# Altium PCB PCB1.PcbDoc (part 2 of 2)
Units mm, origin at the board's own origin, x right, y up, seen from the top; angles counter-clockwise.
Board outline 22.86 x 46 mm, 4 copper layers (Top Layer (sig), Plane (gnd), Plane2 (gnd), Bottom Layer (sig)), stack 1.566 mm thick; 61 components, 57 nets, 283 pads, 148 vias.
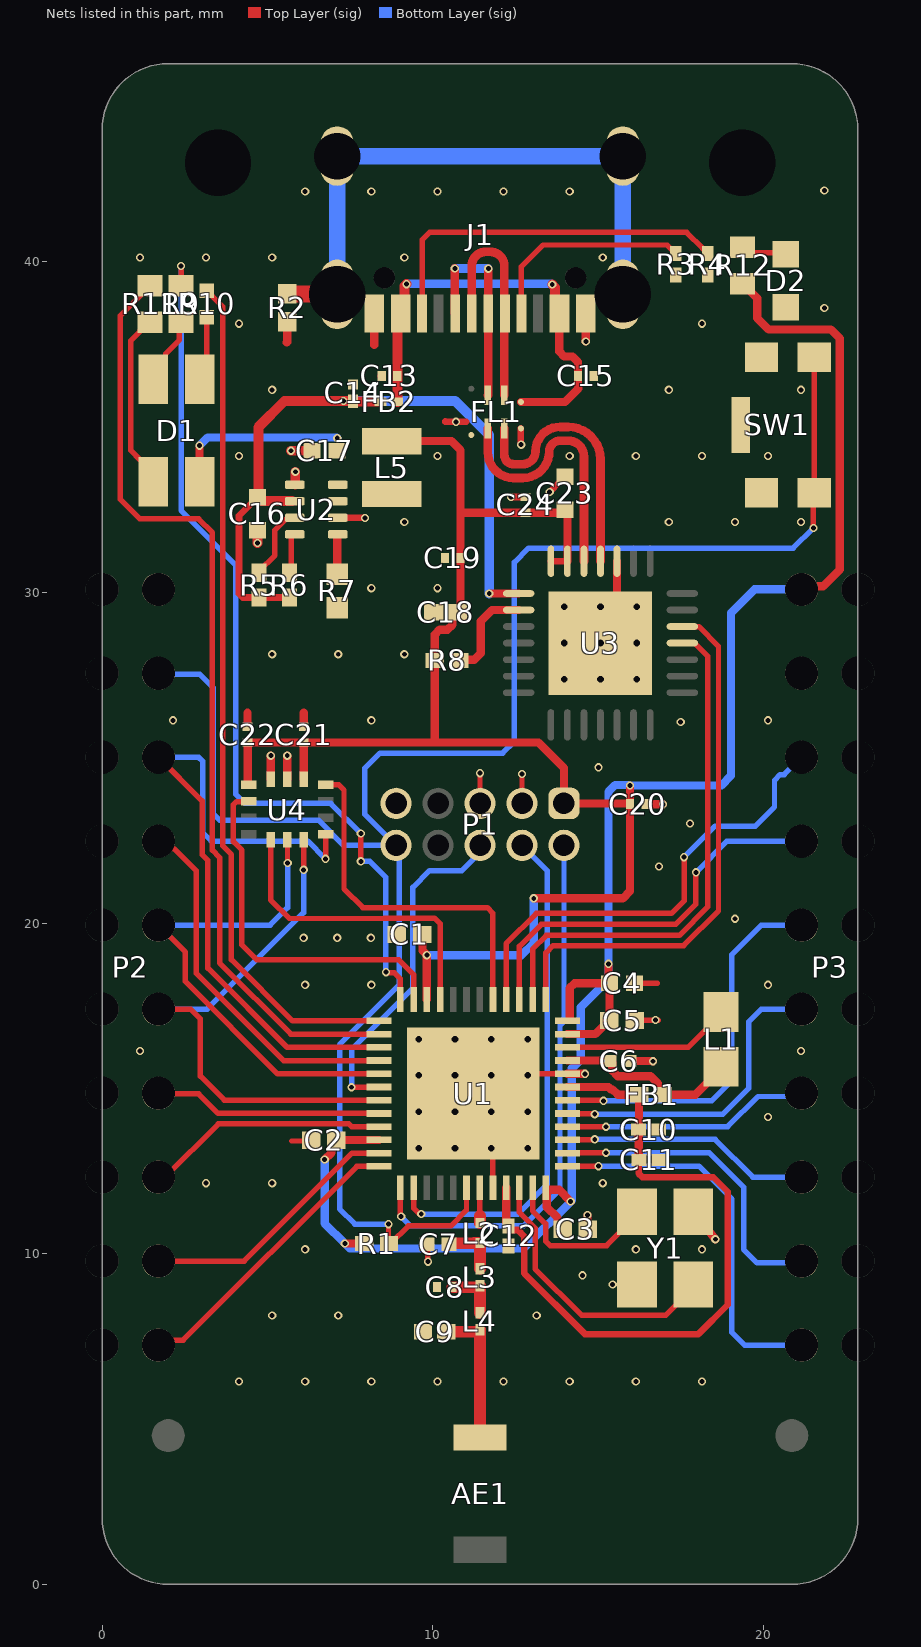
[diagram p4: the nets of this part, all layers, seen from the top]

## Part data (continued)
U3: library part CMP-2000-04924-1, "Single-Chip USB to URAT Bridge, 3.3 V, -40 to 85 degC, 28-Pin QFN, RoHS, Tape and Reel", Manufacturer="Silicon Labs", Operating Supply Voltage (Max)=3.6V, Operating Supply Voltage (Min)=3V, Operating Supply Voltage (Typ)=3.3V, Operating Temperature (Max)=85C, Operating Temperature (Min)=-40C, Operating Temperature Classification=Industrial, Package Description="28-Pin Quad-Flat No-Leads Package, Body 5 x 5 mm, Pitch 0.5 mm", Package Reference=QFN-28, Package Type=QFNEP, Supply Current=26mA, Data Rate=1000kbps, Datasheet URL=http://www.mouser.com/ds/2/368/CP2102-9-247052.pdf, Datasheet Version="Rev. 1.6, 12/2013", Interface Circuit Standard 1=RS-232, Manufacturer URL=http://www.silabs.com/, Mounting=SurfaceMount, Number of Channels=1, Package URL=http://www.silabs.com/Support%20Documents/TechnicalDocs/C8051T61x.pdf, Packaging=TapeandReel, Pin Count=28, Rad Hardened=No, Transmitter and Receiver FIFO Counter=No
U4: "BMI323 / IMU combining accelerometer and gyroscope /  / Accelerometer (A): 16-bit / ±2 g: 16384 LSB/g / ±4 g: 8192 LSB/g / ±8 g: 4096 LSB/g / ±16 g: 2048 LSB/g /  / Gyroscope (G): 16-bit / ±125 °/s: 262.1 LSB/°/s / ±250 °/s: 131.1 LSB/°/s / ±500 °/s: 65.5 LSB/°/s / ±1000 °/s: 32.8 LSB/°/s / ±2000 °/s: 16.4 LSB/°/s /  / Output data rate (ODR) / (A): 12.5 Hz … 6.4 kHz / (G): 25 Hz … 6.4 kHz"
Y1: library part CMP-27762-014975-1, "Crystal 32MHz ±30ppm (Tol) ±30ppm (Stability) 10pF FUND 50Ω 4-Pin SMD T/R", Case/Package=CSMD, ESR (Equivalent Series Resistance)=50R, Frequency Stability=30ppm, Load Capacitance=10pF, Max Operating Temperature=70°C, Min Operating Temperature=-20°C, Package Quantity=1000, Depth=2.5mm, Frequency=32MHz, Frequency Tolerance=30ppm, Height=1mm, Lead Free="Lead Free", Length=3.2mm, Mount="Surface Mount", Number of Pins=4, Packaging="Tape and Reel", Series=ABM8G, Series Resistance=50R, Termination=SMD/SMT, Tolerance=30ppm, Width=2.5mm

## Via types
v1: diameter 0.25, hole 0.15, Top Layer (sig) to Bottom Layer (sig), tented both sides, 123 vias
v2: diameter 0.5, hole 0.2, Top Layer (sig) to Bottom Layer (sig), tented both sides, 25 vias

## Nets (pads, with @x,y where several pads share a name; then routed paths per layer and width w, separated by ;. In a path a pad name is that pad's centre, name@x,y a point inside that pad or via, vN(x,y) a via of type N, cw(c..) or ccw(c..) an arc to the next point about the centre after c; other vN are vias at no path point)
3V3: C1.2 C2.2 C3.2 C4.1 C5.2 C17.1 C18.1 C19.1 C20.1 C21.1 C22.1 C23.1 C24.1 D1.1 L5.2 P1.1 P3.1 R1.2 R8.1 R12.1 U1.10 U1.22 U1.36 U1.47 U1.48 U2.8 U3.6 U3.7 U4.5 U4.8 | length 107.4
  Top Layer (sig) w0.165: C17.1@7.11,34.29 C17.1@7.127,34.273
  Top Layer (sig) w0.2: U3.7@13.574,30.948 U3.6@14.049,30.948
  Top Layer (sig) w0.25: D1.1@2.946,33.477 v1(2.946,34.442) ; U4.8@4.437,24.188 4.402,24.188 C22.1@4.402,25.467 C21.1@6.099,25.467 ; U4.5@6.099,24.351 6.099,24.463 C21.1@6.099,25.467 ; v1(6.731,12.852) 6.932,13.053 6.932,13.302 7.071,13.441 8.368,13.441 U1.22@8.372,13.445 ; v1(7.341,10.312) 7.928,10.312 R1.2@7.93,10.311 ; L5.2@8.763,34.582 10.568,34.582 10.842,34.308 C18.1@10.842,29.492 ; C1.2@9.687,19.66 9.687,19.168 v1(9.822,19.033) U1.10@9.822,17.695 ; C18.1@10.756,29.406 10.72,29.406 10.593,29.279 10.593,29.025 10.447,28.879 10.209,28.879 10.063,28.733 R8.1@10.063,27.95 10.063,25.472 10.058,25.467 ; 10.989,32.413 C24.1@12.775,32.413 ; C24.1@12.8,32.413 13.912,32.413 C23.1@14,32.5 14.074,32.426 U3.6@14.074,30.948 ; v1(13.056,20.752) 15.748,20.752 15.964,20.968 C20.1@15.964,23.602 C20.1@15.964,23.622 ; U1.36@13.447,11.97 U1.36@13.447,11.938 ; C3.2@13.816,10.853 C3.2@13.928,10.741 13.908,10.741 13.773,10.876 13.773,11.094 13.447,11.42 U1.36@13.447,11.938 ; U1.47@14.072,16.645 14.918,16.645 15.326,17.053 C5.2@15.346,17.053 15.345,17.054 C4.1@15.344,18.182 ; U1.48@14.143,17.07 14.143,18.035 14.29,18.182 C4.1@15.344,18.182 ; v1(14.173,11.582) 13.818,11.938 U1.36@13.447,11.938 ; v1(15.316,18.771) 15.316,18.209 C4.1@15.344,18.182 ; v1(15.964,24.168) C20.1@15.964,23.622 ; R12.1@19.369,39.348 19.419,39.348 19.619,39.148 19.619,39.098 19.812,38.906 19.812,38.304 20.16,37.956 22.042,37.956 22.314,37.684 22.314,30.696 21.807,30.189 21.25,30.189 P3.1@21.16,30.099 ; C21.1@6.099,25.467 10.058,25.467 ; 10.058,25.467 13.199,25.467 13.97,24.696 P1.1@13.97,23.622 C20.1@15.964,23.622 ; C4.1@15.344,18.182 C4.1@15.344,18.182
  Bottom Layer (sig) w0.25: v1(2.946,34.442) 3.194,34.69 7.093,34.69 v1(7.112,34.671) ; v1(6.731,12.852) 6.731,10.922 v1(7.341,10.312) 7.493,10.16 12.751,10.16 14.206,11.615 14.206,15.61 14.478,15.882 14.478,17.459 15.316,18.297 v1(15.316,18.771) 15.316,23.978 15.519,24.181 15.951,24.181 v1(15.964,24.168) 18.732,24.168 19.025,24.46 19.025,29.388 19.736,30.099 P3.1@21.16,30.099 ; v1(9.822,19.033) 12.683,19.033 13.056,19.406 v1(13.056,20.752)
CC1: J1.A5 R3.2 | length 6.5
  Top Layer (sig) w0.165: J1.A5@12.68,38.447 12.68,39.858 13.335,40.513 17.089,40.513 17.206,40.396 17.256,40.396 17.348,40.304 R3.2@17.348,40.254
CC2: J1.B5 R4.2 | length 11.2
  Top Layer (sig) w0.165: J1.B5@9.68,38.447 9.68,40.668 9.906,40.894 17.68,40.894 18.173,40.401 18.223,40.401 18.315,40.309 R4.2@18.315,40.259
CSB: U1.9 U4.12 | length 9.5
  Top Layer (sig) w0.165: U4.12@5.099,22.525 5.099,20.707 5.664,20.142 8.53,20.142 8.54,20.152 10.053,20.152 10.222,19.983 U1.9@10.222,17.695
GND: C1.1 C2.1 C3.1 C4.2 C5.1 C6.2 C7.1 C8.2 C9.2 C10.2 C11.2 C12.2 C13.2 C14.2 C15.2 C16.2 C17.2 C18.2 C19.2 C20.2 C21.2 C22.2 C23.2 C24.2 D2.1 FL1.5 FL1.8 J1.A1-B12 J1.B1-A12 P1.3 P1.5 P1.9 P2.10 P3.2 R2.1 R3.1 R4.1 R7.1 SW1.A1 SW1.A2 SW1.G1 U1.32 U1.44 U1.49 U2.1 U2.6 U3.3 U3.29 U4.6 U4.7 Y1.2 Y1.4 | length 20.9
  Top Layer (sig) w0.165: 5.74,13.411 6.301,13.411 C2.1@6.327,13.437 ; C9.2@9.713,7.706 C9.2@9.723,7.716 ; v1@9.83,9.804 v1(9.855,9.76) 9.855,10.16 C7.1@9.83,10.287 ; P1.5@11.43,23.622 v1(11.43,24.536) ; v2(11.772,13.195) 11.822,13.145 U1.32@11.822,11.995 ; P1.3@12.7,23.622 v1(12.7,24.511) ; v2(12.872,15.395) 12.922,15.445 U1.44@14.072,15.445 ; C4.2@16.101,18.182 16.785,18.182 16.789,18.186 ; C5.1@16.106,17.053 16.122,17.069 v1@16.815,17.069 ; C10.2@16.831,13.758 C10.2@16.836,13.762 ; C11.2@16.841,12.841 C11.2@16.847,12.847 ; SW1.G1@19.314,35.07 SW1.G1@19.326,35.082 ; SW1.A1@19.889,33.02 SW1.A1@19.939,33.02 SW1.A1@19.989,33.02 ; SW1.A2@19.889,37.12 SW1.A2@19.989,37.12
  Top Layer (sig) w0.2: U2.6@7.277,32.258 v1(7.95,32.258) ; 10.375,35.175 10.384,35.166 v1(10.706,35.166) 11.012,35.166 ; v1(12.37,32.893) 12.373,32.89 12.797,32.89 C24.2@12.8,32.888 ; v1@12.667,34.483 FL1.8@12.667,34.966 ; v1(13.538,33.045) 13.843,33.35 C23.2@13.85,33.35
  Top Layer (sig) w0.25: 4.394,26.365 4.394,25.942 C22.2@4.402,25.942 ; U4.7@5.099,24.351 5.099,25.063 v1(5.103,25.067) ; 5.588,37.567 5.598,37.577 R2.1@5.598,38.191 ; U4.6@5.599,24.351 v1(5.599,25.067) ; 6.096,26.365 6.096,25.942 C21.2@6.099,25.942 ; C14.2@7.594,36.293 C14.2@7.595,36.294 ; 8.23,37.491 J1.B1-A12@8.23,38.447 ; C13.2@8.454,36.551 C13.2@8.454,36.553 ; C18.2@10.012,29.388 C18.2@10.03,29.406 ; C19.2@10.367,31.039 C19.2@10.367,31.051 ; U1.44@14.072,15.445 v1(14.606,15.445) ; v1(14.63,37.592) J1.A1-B12@14.63,38.447 ; C3.1@14.681,10.719 v1(14.681,11.176) ; v2(15.074,29.573) 15.234,29.573 15.574,29.913 U3.3@15.574,30.948 ; C6.2@15.936,15.828 16.659,15.828 v1(16.662,15.824) ; C20.2@16.439,23.602 16.439,23.597 v1(16.967,23.597) ; Y1.2@17.907,11.278 18.355,10.693 v1(18.548,10.439)
  Top Layer (sig) w0.3: v1(4.699,31.496) C16.2@4.699,31.877 ; v1(5.715,34.29) C17.2@6.35,34.29 ; U2.1@5.842,33.274 v1(5.842,33.655)
  other v1: 4.142,6.134 6.142,6.134 8.142,6.134 10.142,6.134 12.142,6.134 14.142,6.134 16.142,6.134 18.142,6.134 5.142,8.134 7.142,8.134 13.142,8.134 15.443,9.068 14.529,9.347 6.142,10.134 16.142,10.134 18.142,10.134 3.142,12.134 5.142,12.134 15.142,12.134 20.142,14.134 1.142,16.134 21.142,16.134 16.739,17.069 6.142,18.134 8.142,18.134 20.142,18.134 6.096,19.558 7.112,19.558 8.128,19.558 19.142,20.134 16.84,21.717 17.78,23.012 15.011,24.714 17.501,26.086 2.142,26.134 8.142,26.134 20.142,26.134 5.142,28.134 7.142,28.134 9.142,28.134 8.142,30.134 10.142,30.134 9.142,32.134 17.142,32.134 19.142,32.134 21.142,32.134 4.142,34.134 10.142,34.134 14.142,34.134 16.142,34.134 18.142,34.134 20.142,34.134 12.675,34.475 5.142,36.134 17.142,36.134 21.142,36.134 4.142,38.134 18.142,38.134 21.844,38.608 1.142,40.134 3.142,40.134 5.142,40.134 9.142,40.134 15.142,40.134 6.142,42.134 8.142,42.134 10.142,42.134 12.142,42.134 14.142,42.134 21.844,42.164
  other v2: 9.572,13.195 10.672,13.195 12.872,13.195 9.572,14.295 10.672,14.295 11.772,14.295 12.872,14.295 9.572,15.395 10.672,15.395 11.772,15.395 9.572,16.495 10.672,16.495 11.772,16.495 12.872,16.495 13.974,27.373 15.074,27.373 16.174,27.373 13.974,28.473 15.074,28.473 16.174,28.473 13.974,29.573 16.174,29.573
INT1: U1.5 U4.4 | length 11
  Top Layer (sig) w0.165: U4.4@6.761,24.188 7.155,24.188 7.315,24.028 7.315,21.036 7.884,20.467 11.655,20.467 11.822,20.3 U1.5@11.822,17.695
INT2: U1.11 U4.9 | length 11.2
  Top Layer (sig) w0.165: U4.9@4.437,23.688 4.428,23.679 4.064,23.679 3.967,23.583 3.967,22.467 4.227,22.207 4.227,19.345 4.674,18.898 8.966,18.898 9.422,18.442 U1.11@9.422,17.695
NetAE1_1: AE1.1 C9.1 L4.2 | length 4.3
  Top Layer (sig) w0.355: C9.1@10.413,7.645 11.369,7.645 L4.2@11.428,7.704 11.428,4.446 AE1.1@11.43,4.443
NetC6_1: C6.1 FB1.1 L1.2 U1.45 | length 5.7
  Top Layer (sig) w0.25: U1.45@14.072,15.845 C6.1@15.311,15.845 ; C6.1@15.357,15.845 15.43,15.772 15.43,15.537 15.595,15.372 16.588,15.372 16.808,15.152 16.808,14.918 16.914,14.811 17.946,14.811 18.72,15.585 L1.2@18.72,15.659
NetC7_2: C7.2 L2.2 L3.1 | length 1.7
  Top Layer (sig) w0.355: C7.2@10.49,10.287 10.522,10.319 11.253,10.319 11.259,10.325 L2.2@11.428,10.325 L3.1@11.428,9.544
NetC8_1: C8.1 L3.2 L4.1 | length 1.7
  Top Layer (sig) w0.355: C8.1@10.601,8.992 11.384,8.992 L3.2@11.428,9.036 L4.1@11.428,8.212
NetC10_1: C10.1 C11.1 C12.1 FB1.2 U1.33 U1.43 | length 21.2
  Top Layer (sig) w0.2: C12.1@12.294,10.845 12.294,10.8 12.375,10.718 12.574,10.718 12.768,10.525 12.768,9.406 14.605,7.569 18.035,7.569 18.923,8.457 18.923,11.878 18.485,12.316 16.345,12.316 16.227,12.433 C11.1@16.227,12.846
  Top Layer (sig) w0.25: U1.33@12.222,11.995 12.222,10.963 12.294,10.891 C12.1@12.294,10.845 ; U1.43@14.072,15.045 15.313,15.045 15.386,14.972 15.439,14.972 15.599,14.812 FB1.2@16.251,14.811 ; C11.1@16.227,12.846 16.227,13.753 C10.1@16.223,13.758 16.237,13.772 16.237,14.797 FB1.2@16.251,14.811
NetD1_2: D1.2 R11.1 | length 5.2
  Top Layer (sig) w0.165: R11.1@1.27,38.024 1.245,38.024 1.158,37.937 1.158,37.911 0.867,37.621 0.867,34.299 1.149,34.018 1.182,34.018 1.549,33.65 D1.2@1.549,33.35
NetD1_3: D1.3 R10.1 | length 2.1
  Top Layer (sig) w0.165: D1.3@2.949,36.45 3.166,36.667 R10.1@3.166,38.429
NetD1_4: D1.4 R9.1 | length 2.1
  Top Layer (sig) w0.165: D1.4@1.549,36.45 1.917,36.818 1.917,37.223 2.337,37.643 2.337,38.134 R9.1@2.382,38.179
NetD2_2: D2.2 R12.2 | length 1.3
  Top Layer (sig) w0.165: R12.2@19.369,40.273 20.632,40.273 D2.2@20.673,40.231
NetJ1_1: J1.1 J1.2 J1.3 J1.4 R2.2 | length 18.5
  Top Layer (sig) w0.5: R2.2@5.598,39.041 5.607,39.031 7.101,39.031 J1.2@7.11,39.022
  Bottom Layer (sig) w0.5: J1.2@7.11,39.022 J1.4@7.11,43.202 J1.3@15.75,43.202 J1.1@15.75,39.022
NetL1_1: L1.1 U1.46 | length 5.1
  Top Layer (sig) w0.165: U1.46@14.072,16.245 17.728,16.245 18.72,17.237 L1.1@18.72,17.311
NetL2_1: L2.1 U1.31 | length 1.3
  Top Layer (sig) w0.165: U1.31@11.422,11.995 11.425,11.992 11.425,10.928 L2.1@11.428,10.925
  Top Layer (sig) w0.355: L2.1@11.428,10.925 11.428,11.146
NetL5_1: L5.1 U2.7
NetR5_2: R5.2 U2.3 | length 2.1
  Top Layer (sig) w0.165: R5.2@4.75,30.601 4.75,30.651 5.226,31.127 5.226,31.886 5.56,32.22 5.677,32.22 U2.3@5.715,32.258
NetR6_2: R6.2 U2.4 | length 1.3
  Top Layer (sig) w0.165: R6.2@5.664,30.601 5.713,30.65 5.713,31.72 5.756,31.762 U2.4@5.827,31.762
NetR7_2: R7.2 U2.5 | length 1.2
  Top Layer (sig) w0.25: R7.2@7.112,30.548 7.112,31.725 U2.5@7.137,31.75
NetR8_2: R8.2 U3.9 | length 3
  Top Layer (sig) w0.25: R8.2@10.813,27.95 10.828,27.965 11.252,27.965 11.455,28.169 11.455,29.134 11.795,29.473 U3.9@12.599,29.473
NetU1_34: U1.34 Y1.1 | length 8.5
  Top Layer (sig) w0.165: U1.34@12.622,11.995 12.622,11.255 13.1,10.776 13.1,9.544 14.509,8.135 17.047,8.135 17.88,8.968 Y1.1@17.88,9.068
NetU1_35: U1.35 Y1.3 | length 5.1
  Top Layer (sig) w0.165: U1.35@13.022,11.995 13.022,11.3 13.415,10.906 13.415,10.384 13.552,10.248 15.26,10.248 16.18,11.168 Y1.3@16.18,11.268
nRST: P1.10 P2.9 R1.1 SW1.B1 SW1.B2 U1.30 | length 56.7
  Top Layer (sig) w0.165: v1(8.661,10.897) 8.661,10.329 R1.1@8.68,10.311 8.73,10.311 9.263,10.844 10.546,10.844 11.022,11.32 U1.30@11.022,11.995 ; v1(21.514,31.953) 21.514,32.995 SW1.B1@21.539,33.02 SW1.B2@21.539,37.12
  Bottom Layer (sig) w0.165: P2.9@1.7,27.559 1.735,27.524 2.956,27.524 3.363,27.117 3.363,23.307 3.556,23.114 6.539,23.114 7.301,22.352 P1.10@8.89,22.352 ; v1(8.661,10.897) 7.645,10.897 7.186,11.356 7.186,16.33 8.981,18.125 8.981,22.261 P1.10@8.89,22.352 ; v1(21.514,31.953) 20.904,31.344 12.903,31.344 12.471,30.912 12.471,25.502 12.116,25.146 8.407,25.146 7.95,24.689 7.95,23.292 P1.10@8.89,22.352
P0.00: P2.2 U1.23 | length 8
  Top Layer (sig) w0.165: P2.2@1.7,9.779 4.298,9.779 7.564,13.045 U1.23@8.372,13.045
P0.01: P2.1 U1.24 | length 8.9
  Top Layer (sig) w0.165: P2.1@1.7,7.239 1.848,7.387 2.448,7.387 7.705,12.645 U1.24@8.372,12.645
P1.02: P3.4 U1.3 | length 12
  Top Layer (sig) w0.165: U1.3@12.622,17.695 12.622,19.302 13.284,19.964 17.346,19.964 17.956,20.574 17.956,21.535 v1(17.96,21.539)
  Bottom Layer (sig) w0.165: v1(17.96,21.539) 18.9,22.479 P3.4@21.16,22.479
P1.03: P3.3 U1.4 | length 14.2
  Top Layer (sig) w0.165: U1.4@12.222,17.695 12.222,19.384 13.132,20.295 17.221,20.295 17.602,20.676 v1(17.602,21.996)
  Bottom Layer (sig) w0.165: v1(17.602,21.996) 18.542,22.936 19.756,22.936 20.337,23.517 20.337,24.318 20.509,24.49 20.631,24.49 P3.3@21.16,25.019
P1.09: P3.10 U1.37 | length 11.7
  Top Layer (sig) w0.165: U1.37@14.072,12.645 15.007,12.645 v1(15.011,12.649)
  Bottom Layer (sig) w0.165: v1(15.011,12.649) 18.052,12.649 19.05,11.651 19.05,7.62 19.431,7.239 P3.10@21.16,7.239
P1.10: P3.9 U1.38 | length 9.6
  Top Layer (sig) w0.165: U1.38@14.072,13.045 14.077,13.05 15.235,13.05 v1(15.24,13.056)
  Bottom Layer (sig) w0.165: v1(15.24,13.056) 18.364,13.056 19.406,12.014 19.406,10.135 19.812,9.728 21.109,9.728 P3.9@21.16,9.779
P1.11: P3.8 U1.39 | length 7.6
  Top Layer (sig) w0.165: U1.39@14.072,13.445 14.08,13.453 14.891,13.453 v1(14.9,13.462)
  Bottom Layer (sig) w0.165: v1(14.9,13.462) 18.542,13.462 19.685,12.319 P3.8@21.16,12.319
P1.12: P3.7 U1.40 | length 7.5
  Top Layer (sig) w0.165: U1.40@14.072,13.845 14.073,13.844 v1(15.24,13.843) v1(15.24,13.843)
  Bottom Layer (sig) w0.165: v1(15.24,13.843) 18.923,13.843 19.838,14.758 21.059,14.758 P3.7@21.16,14.859
P1.13: P3.6 U1.41 | length 9.6
  Top Layer (sig) w0.165: U1.41@14.072,14.245 14.082,14.234 14.89,14.234 v1(14.9,14.224)
  Bottom Layer (sig) w0.165: v1(14.9,14.224) 18.778,14.224 19.558,15.004 19.558,17.018 19.939,17.399 P3.6@21.16,17.399
P1.14: P3.5 U1.42 | length 11.5
  Top Layer (sig) w0.165: U1.42@14.072,14.645 14.079,14.638 15.155,14.638 v1(15.164,14.628)
  Bottom Layer (sig) w0.165: v1(15.164,14.628) 18.438,14.628 19.05,15.24 19.05,19.05 19.939,19.939 P3.5@21.16,19.939
P2.01: R9.2 U1.12 | length 27.3
  Top Layer (sig) w0.165: R9.2@2.388,39.294 v1(2.388,39.878) ; v1(7.823,21.869) v1(7.823,22.71) ; v1(8.585,18.517) 8.601,18.5 8.836,18.5 9.019,18.317 9.019,17.697 U1.12@9.022,17.695
  Bottom Layer (sig) w0.165: v1(2.388,39.878) 2.388,32.487 4.039,30.836 4.039,23.901 ; 4.064,23.876 4.318,23.622 6.911,23.622 v1(7.823,22.71) ; v1(7.823,21.869) 8.103,21.869 8.585,21.387 v1(8.585,18.517)
P2.02: R10.2 U1.13 | length 25.8
  Top Layer (sig) w0.165: R10.2@3.166,39.129 3.309,38.987 3.652,38.643 3.652,22.337 3.912,22.077 3.912,18.898 5.765,17.044 U1.13@8.371,17.044
P2.03: R11.2 U1.14 | length 28.9
  Top Layer (sig) w0.165: R11.2@1.45,39.279 0.552,38.381 0.552,32.819 1.138,32.233 2.921,32.233 3.337,31.817 3.337,22.206 3.556,21.987 3.556,18.796 5.707,16.645 U1.14@8.372,16.645
P2.04: P2.8 U1.15 U4.1 | length 21.5
  Top Layer (sig) w0.165: P2.8@1.7,25.019 3.022,23.697 3.022,22.076 3.2,21.897 3.2,18.644 5.599,16.245 U1.15@8.372,16.245 ; v1(6.756,21.946) 6.759,21.948 6.759,22.686 U4.1@6.761,22.688
  Bottom Layer (sig) w0.165: P2.8@1.7,25.019 2.921,25.019 3.048,24.892 3.048,22.733 3.302,22.479 6.223,22.479 v1(6.756,21.946)
P2.05: P2.7 U1.16 | length 11.2
  Top Layer (sig) w0.165: P2.7@1.7,22.479 1.926,22.479 2.162,22.243 2.191,22.243 2.845,21.59 2.845,18.491 5.491,15.845 U1.16@8.372,15.845
P2.06: P2.6 U1.17 U4.13 | length 15.2
  Top Layer (sig) w0.165: P2.6@1.7,19.939 2.515,19.124 2.515,18.237 5.307,15.445 U1.17@8.372,15.445 ; U4.13@5.599,22.525 5.606,22.518 5.606,21.826 v1(5.613,21.819)
  Bottom Layer (sig) w0.165: P2.6@1.7,19.939 5.08,19.939 5.613,20.472 v1(5.613,21.819)
P2.08: P2.5 U1.19 U4.14 | length 16.6
  Top Layer (sig) w0.165: P2.5@1.7,17.399 2.679,17.399 2.972,17.106 2.972,15.372 3.699,14.645 U1.19@8.372,14.645 ; v1(6.096,21.615) 6.098,21.617 U4.14@6.099,22.525 U4.14@6.099,22.525
  Bottom Layer (sig) w0.165: P2.5@1.7,17.399 3.175,17.399 6.096,20.32 v1(6.096,21.615)
P2.09: P2.4 U1.20 | length 6.9
  Top Layer (sig) w0.165: P2.4@1.7,14.859 1.725,14.834 2.92,14.834 3.51,14.245 U1.20@8.372,14.245
P2.10: P2.3 U1.21 | length 7.4
  Top Layer (sig) w0.165: P2.3@1.7,12.319 1.905,12.319 3.515,13.929 7.463,13.929 7.547,13.845 U1.21@8.372,13.845
SWCLK: P1.4 U1.26 | length 15.7
  Top Layer (sig) w0.165: U1.26@9.423,11.994 9.423,11.38 9.585,11.218 9.636,11.218 v1(9.652,11.201)
  Bottom Layer (sig) w0.165: v1(9.652,11.201) 12.573,11.201 13.462,12.09 13.462,21.59 P1.4@12.7,22.352
SWDIO: P1.2 U1.25 | length 16.7
  Top Layer (sig) w0.165: U1.25@9.022,11.995 9.019,11.992 9.019,11.173 9.043,11.149 v1(9.043,11.126)
  Bottom Layer (sig) w0.165: v1(9.043,11.126) 9.326,10.844 12.749,10.844 13.849,11.944 13.849,16.906 13.97,17.027 P1.2@13.97,22.352
SWO: P1.6 U1.18 | length 10.3
  Top Layer (sig) w0.165: v1(7.544,15.037) 7.548,15.041 8.368,15.041 U1.18@8.372,15.045
  Bottom Layer (sig) w0.165: v1(7.544,15.037) 7.544,16.18 9.398,18.034 9.398,21.082 9.906,21.59 10.88,21.59 11.43,22.14 P1.6@11.43,22.352
UART_RX: U1.2 U3.25 | length 15.9
  Top Layer (sig) w0.165: U1.2@13.022,17.695 13.022,19.219 13.437,19.634 17.461,19.634 18.317,20.49 18.317,28.08 17.935,28.462 17.56,28.462 U3.25@17.549,28.473
UART_TX: U1.1 U3.26 | length 16.5
  Top Layer (sig) w0.165: U1.1@13.422,17.695 13.422,19.101 13.64,19.319 17.592,19.319 18.644,20.371 18.644,28.372 18.049,28.966 17.555,28.966 U3.26@17.549,28.973
USB_D_N: FL1.2 J1.A7 J1.B7 | length 6.8
  Top Layer (sig) w0.265: J1.A7@11.18,38.447 11.18,39.882 cw(c11.608,39.882) 11.608,40.31 11.735,40.31 cw(c11.735,39.878) 12.167,39.878 FL1.2@12.167,35.966
USB_D_P: FL1.3 J1.A6 J1.B6 | length 6.2
  Top Layer (sig) w0.265: J1.B6@10.668,38.459 v1(10.668,39.802) ; FL1.3@11.667,35.966 11.68,35.966 J1.A6@11.68,38.447 v1(11.68,39.798)
  Bottom Layer (sig) w0.265: v1(10.668,39.802) 11.68,39.802 v1(11.68,39.798)
USBD_N: FL1.6 U3.5 | length 8.2
  Top Layer (sig) w0.265: FL1.6@11.667,34.966 11.667,34.246 ccw(c12.446,34.246) 12.446,33.467 12.725,33.467 ccw(c12.725,34.265) 13.523,34.265 cw(c13.854,34.265) 13.854,34.595 14.097,34.595 cw(c14.097,34.118) 14.574,34.118 U3.5@14.574,30.948
USBD_P: FL1.7 U3.4 | length 8.2
  Top Layer (sig) w0.265: FL1.7@12.167,34.966 12.167,34.163 ccw(c12.446,34.163) 12.446,33.884 12.725,33.884 ccw(c12.725,34.265) 13.106,34.265 cw(c13.854,34.265) 13.854,35.012 14.097,35.012 cw(c14.097,34.035) 15.074,34.035 U3.4@15.074,30.948
V_USB: C14.1 C16.1 FB2.2 R5.1 R6.1 U2.2 U3.8 | length 22.4
  Top Layer (sig) w0.2: C16.1@4.648,32.791 4.605,32.791 4.14,32.326 4.14,29.968 4.257,29.851 R5.1@4.75,29.851 ; R5.1@4.772,29.873 4.795,29.851 R6.1@5.664,29.851 ; U2.2@5.745,32.766 5.823,32.766 U2.2@5.827,32.762 ; FB2.2@8.408,35.78 FB2.2@8.42,35.769
  Top Layer (sig) w0.25: v1(11.709,29.972) U3.8@12.599,29.973 U3.8@12.599,29.973
  Top Layer (sig) w0.3: C16.1@4.699,32.885 4.818,32.766 U2.2@5.745,32.766 ; C16.1@4.724,32.944 4.724,35.001 5.515,35.791 v1(7.299,35.791) C14.1@7.594,35.791 ; C14.1@7.637,35.78 FB2.2@8.408,35.78
  Bottom Layer (sig) w0.3: v1(7.299,35.791) 10.682,35.791 11.709,34.764 v1(11.709,29.972)
VBUS: C13.1 C15.1 FB2.1 FL1.1 J1.A4-B9 J1.B4-A9 | length 13.6
  Top Layer (sig) w0.25: J1.B4-A9@8.929,38.346 J1.B4-A9@9.03,38.447 ; FL1.1@12.667,35.766 13.999,35.766 14.402,36.17 14.394,36.177 C15.1@14.394,36.553 14.394,36.974 14.224,37.144 13.976,37.144 13.83,37.291 J1.A4-B9@13.83,38.447
  Top Layer (sig) w0.3: FB2.1@8.928,35.769 C13.1@8.929,36.553 ; C13.1@8.929,36.553 J1.B4-A9@8.929,38.346 ; J1.B4-A9@9.03,38.447 9.145,38.562 9.145,39.27 v1(9.205,39.329) ; v1(13.614,39.319) 13.703,39.231 13.703,38.574 J1.A4-B9@13.83,38.447
  Bottom Layer (sig) w0.25: v1(9.205,39.329) 9.22,39.345 13.589,39.345 v1(13.614,39.319)
pads on no net: AE1.2 FD1.1 FD2.1 FL1.4 J1. J1.A8 J1.B8 MH1.3 MH2.3 P1.7 P1.8 P2. P3. U1.6 U1.7 U1.8 U1.27 U1.28 U1.29 U3.1 U3.2 U3.10 U3.11 U3.12 U3.13 U3.14 U3.15 U3.16 U3.17 U3.18 U3.19 U3.20 U3.21 U3.22 U3.23 U3.24 U3.27 U3.28 U4.2 U4.3 U4.10 U4.11

## Polygon pours and split planes (outlines as drawn)
GND on Top Layer (sig) "GND_L01_P009" (solid, remove dead copper, pour order 9): 0.508,5.588 22.352,5.588 22.352,44.704 0.508,44.704
NetL5_1 on Top Layer (sig) "NETL5_1_L01_P006" (solid, pour order 6): 6.807,32.639 6.807,32.893 6.833,32.918 7.518,32.918 7.671,33.041 7.671,33.35 7.747,33.426 9.652,33.426 9.703,33.376 9.703,32.588 9.652,32.537 7.569,32.537 7.442,32.614 6.833,32.614
V_USB on Top Layer (sig) "V_USB_L01_P008" (solid, pour order 8): 6.147,32.664 6.147,32.868 6.096,32.918 5.359,32.918 5.131,33.147 4.445,33.147 4.394,33.096 4.394,32.664 4.445,32.614 6.096,32.614
3V3 on Top Layer (sig) "3V3_L01_P007" (solid, pour order 7): 6.858,33.122 7.417,33.122 7.468,33.172 7.468,33.96 7.62,34.112 9.652,34.112 9.728,34.188 9.728,34.976 9.677,35.027 7.137,35.027 6.807,34.696 6.807,33.172
GND on Plane (gnd) "GND_L02_P000" (solid, remove dead copper, pour order 0): 0.508,5.588 22.352,5.588 22.352,44.704 0.508,44.704
GND on Plane2 (gnd) "GND_L03_P001" (solid, pour order 1): 0.508,5.588 22.352,5.588 22.352,44.704 0.508,44.704
GND on Bottom Layer (sig) "GND_L04_P003" (solid, remove dead copper, pour order 3): 0.508,5.588 22.352,5.588 22.352,44.704 0.508,44.704

## Keep-outs
Keep-Out Layer:
  rectangle: 0,0 22.86,5.334

## Silkscreen, mask and mechanical layers (free items; w line width, h text height)
Top Overlay:
  circle w0.2: c5.234,28.473 r0.1
  circle w0.1: c5.234,28.473 r0.353
  lines w0.1: 4.955,26.899 5.234,26.619 ; 5.234,26.645 5.234,26.619 ; 5.234,28.067 5.234,26.619 ; 5.513,26.899 5.234,26.619 ; 5.615,28.473 7.063,28.473 ; 6.783,28.194 7.063,28.473 ; 6.783,28.753 7.063,28.473
  lines w0.2: 0.002,28.958 1.778,28.958 ccw(c1.7,30.099) 1.778,31.24 0.002,31.24 ; 22.817,26.424 21.184,26.424 cw(c21.135,27.584) 21.179,28.745 22.817,28.745
  text "RGB" at 4.078,36.576 h1.52 r270
  text "RST" at 18.757,33.706 h1.52 r90
  text "GND" at 3.275,30.888 h0.6 r270
  text "3V3" at 19.966,29.31 h0.6 r90
  text "RST" at 2.894,28.348 h0.6 r270
  text "Y" at 7.644,28.167 h0.6
  text "GND" at 19.56,26.77 h0.6 r90
  text "X" at 5.028,25.246 h0.6
  text "1" at 2.894,25.173 h0.6 r270
  text "16" at 19.966,24.611 h0.6 r90
  text "2" at 2.894,22.76 h0.6 r270
  text "15" at 19.966,22.071 h0.6 r90
  text "3" at 2.894,20.22 h0.6 r270
  text "14" at 19.966,19.531 h0.6 r90
  text "4" at 2.894,17.68 h0.6 r270
  text "13" at 19.966,16.966 h0.4 r90
  text "5" at 2.894,15.14 h0.6 r270
  text "12" at 19.941,14.553 h0.4 r90
  text "6" at 2.894,12.473 h0.6 r270
  text "11" at 19.966,11.911 h0.6 r90
  text "7" at 2.894,9.806 h0.6 r270
  text "10" at 19.966,9.295 h0.6 r90
  text "8" at 2.894,7.393 h0.6 r270
  text "9" at 19.941,7.11 h0.6 r90
  text "miniDevKit" at 12.852,1.775 h2
  text "nRF54L15" at 1.643,1.744 h2
Mechanical 1:
  the board outline again, w0.254
Dimensions:
  drawing of 196 lines, arcs and shapes, not listed
  text "Layer" at 32.505,34.477 h1.53
  text "Name" at 38.897,34.477 h1.53
  text "Material" at 52.959,34.477 h1.53
  text "Thickness" at 64.061,34.477 h1.53
  text "Constant" at 73.182,34.477 h1.53
  text "Board Layer Stack" at 81.625,34.477 h1.53
  text "Top Overlay" at 38.897,31.42 h1.53
  text "Top Solder" at 38.897,28.363 h1.53
  text "Solder Resist" at 52.959,28.363 h1.53
  text "0.010mm" at 64.061,28.363 h1.53
  text "3.5" at 73.182,28.363 h1.53
  text "1" at 32.505,25.306 h1.53
  text "Top Layer (sig)" at 38.897,25.306 h1.53
  text "0.035mm" at 64.061,25.306 h1.53
  text "Dielectric 2" at 38.897,22.25 h1.53
  text "PP-006" at 52.959,22.25 h1.53
  text "0.203mm" at 64.061,22.25 h1.53
  text "4.4" at 73.182,22.25 h1.53
  text "2" at 32.504,19.193 h1.53
  text "Plane (gnd)" at 38.897,19.193 h1.53
  text "GND2" at 52.959,19.193 h1.53
  text "0.030mm" at 64.061,19.193 h1.53
  text "Dielectric 1" at 38.897,16.136 h1.53
  text "FR-4" at 52.959,16.136 h1.53
  text "1.030mm" at 64.061,16.136 h1.53
  text "4.6" at 73.182,16.136 h1.53
  text "3" at 32.505,13.079 h1.53
  text "Plane2 (gnd)" at 38.897,13.079 h1.53
  text "GND2" at 52.959,13.079 h1.53
  text "0.030mm" at 64.061,13.079 h1.53
  text "Dielectric 3" at 38.897,10.023 h1.53
  text "PP-006" at 52.959,10.023 h1.53
  text "0.203mm" at 64.061,10.023 h1.53
  text "4.4" at 73.182,10.023 h1.53
  text "4" at 32.505,6.966 h1.53
  text "Bottom Layer (sig)" at 38.897,6.966 h1.53
  text "0.035mm" at 64.061,6.966 h1.53
  text "Bottom Solder" at 38.897,3.909 h1.53
  text "Solder Resist" at 52.959,3.909 h1.53
  text "0.010mm" at 64.061,3.909 h1.53
  text "3.5" at 73.182,3.909 h1.53
  text "Bottom Overlay" at 38.897,0.852 h1.53
  text "Total board thickness:" at 32.505,-2.205 h1.53
  text "1.586mm" at 64.061,-2.205 h1.53

## Dimensions
0,2 to 22.86,2 on Dimensions
20.86,46 to 20.86,0 on Dimensions